# Altium PCB PCB1.PcbDoc
Units mil, origin at the board's own origin, x right, y up, seen from the top; angles counter-clockwise.
Board outline 3950 x 1900 mil, 2 copper layers (Top Layer, Bottom Layer); 32 components, 25 nets, 131 pads, 21 vias.
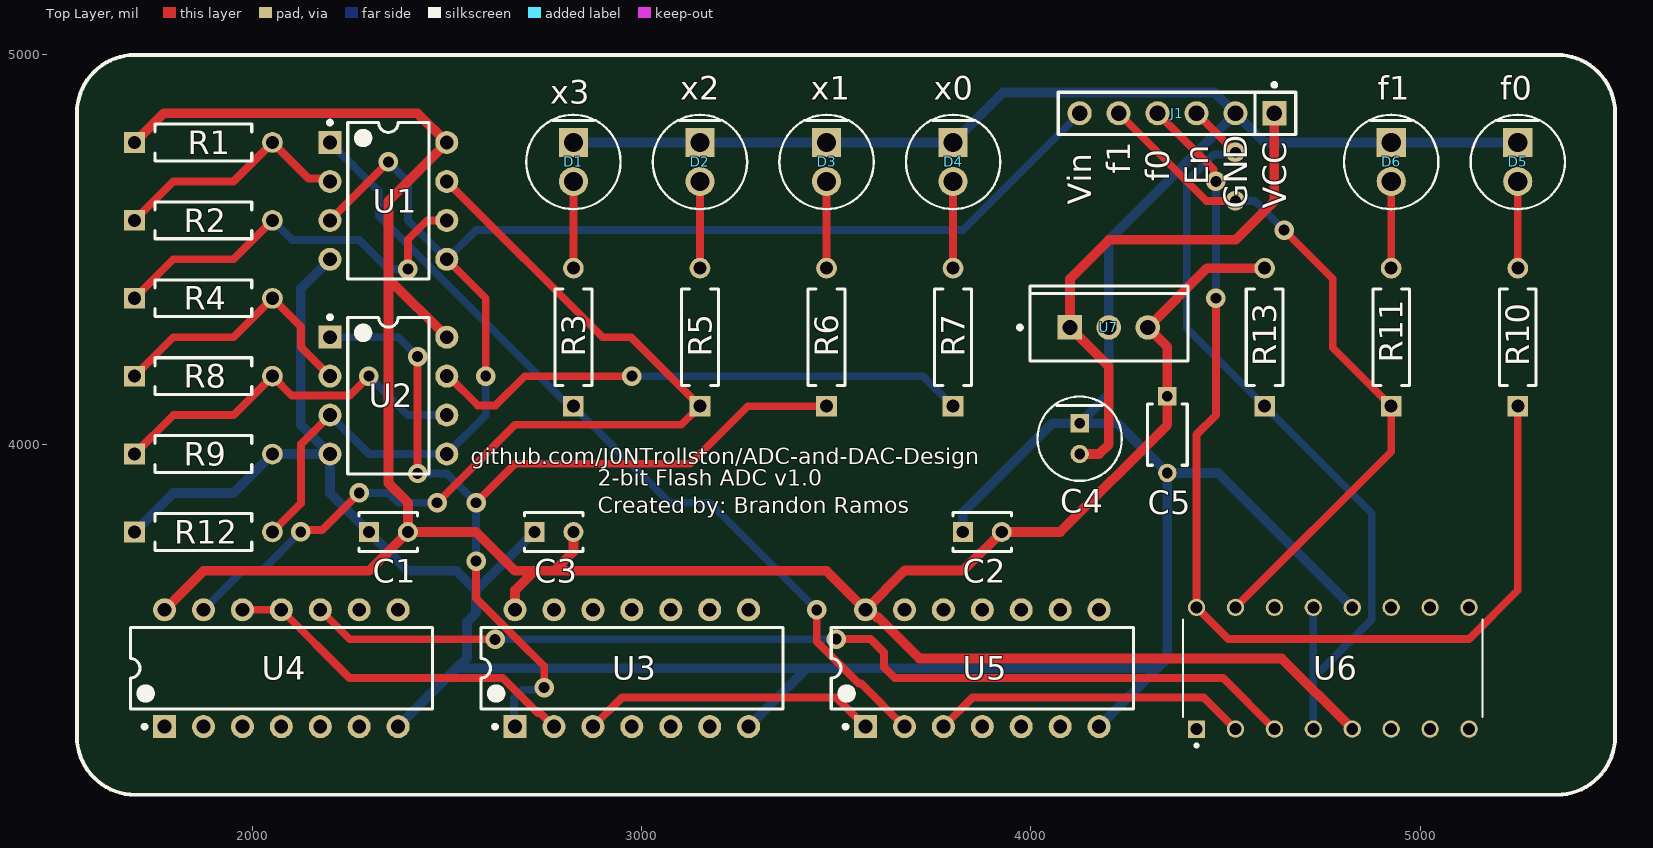
[diagram p0: Top Layer view]
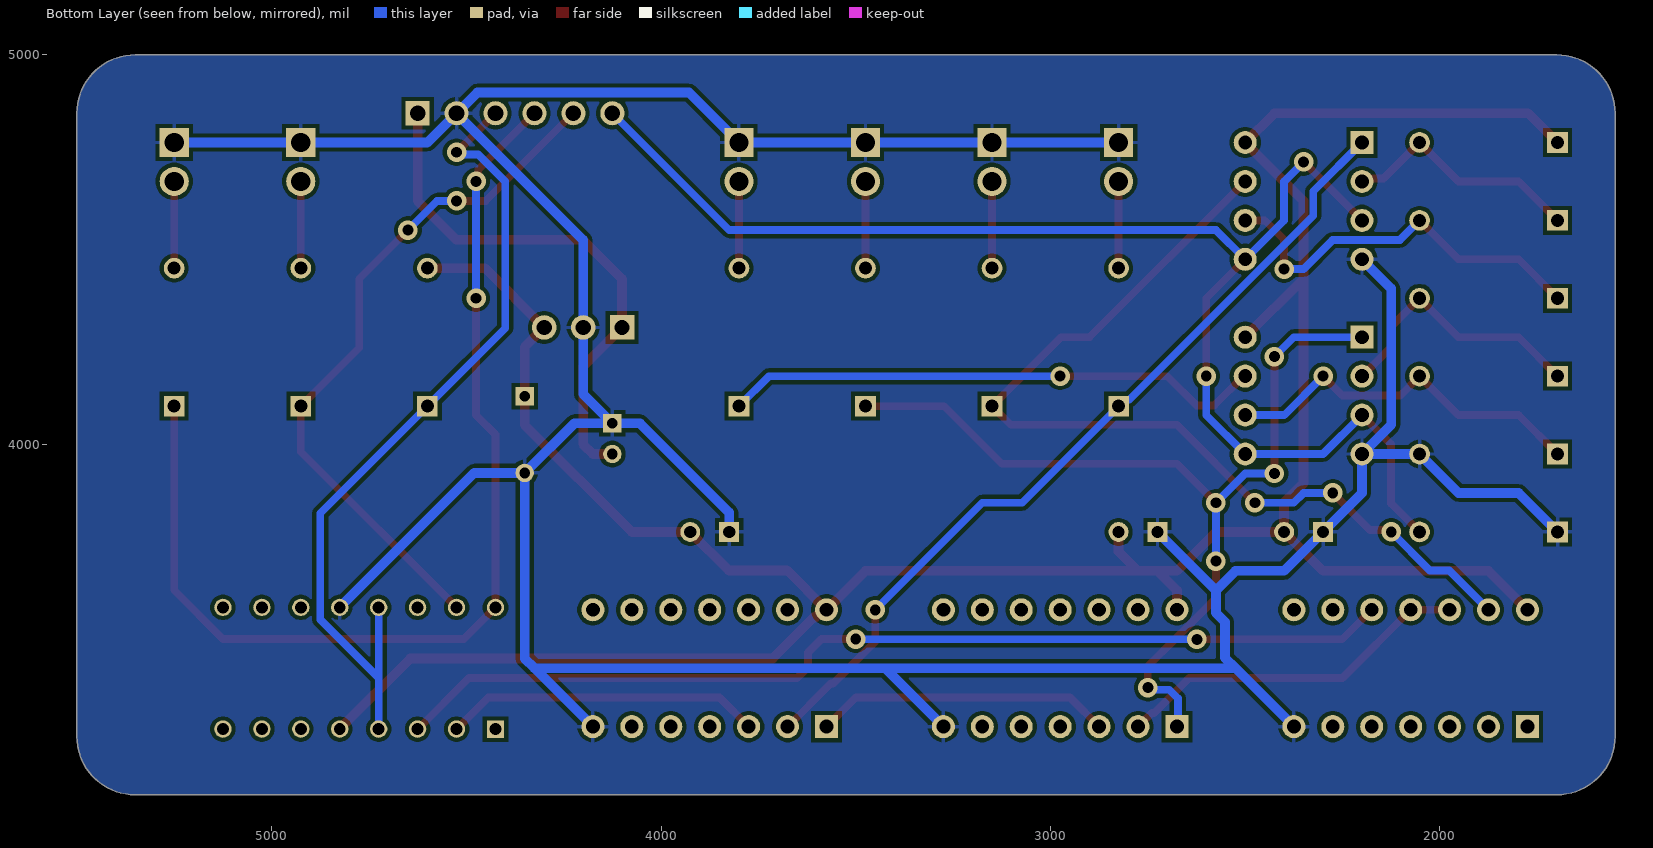
[diagram p1: Bottom Layer view, seen from below]

## Layer stack, top to bottom
Top Solder: solder mask 0.4, Solder Resist, Dk 3.5
Top Layer: signal copper 1.4
Dielectric 1: dielectric 12.6, FR-4, Dk 4.8
Bottom Layer: signal copper 1.4
Bottom Solder: solder mask 0.4, Solder Resist, Dk 3.5

## Board outline
1550,3250 1550,4850 cw(c1700,4850) 1700,5000 5350,5000 cw(c5350,4850) 5500,4850 5500,3250 cw(c5350,3250) 5350,3100 1700,3100 cw(c1700,3250)

## Design rules (kind name [scope] priority, off if disabled: settings)
Clearance POWER [InNetClass('Power')] p1: gap=10 ignorepadtopadclearanceinfootprint=TRUE
Clearance Clearance_1 [All] p2: gap=5 ignorepadtopadclearanceinfootprint=FALSE
PolygonConnect [All] p1: connectstyle=Relief reliefconductorwidth=10 reliefentries=4 polygonreliefangle="90 Angle" airgapwidth=10
RoutingVias [All] p1: holewidth=28 width=50 viastyle="Through Hole" minholewidth=28 minwidth=50 maxholewidth=28 maxwidth=50
SolderMaskExpansion [All] p1: expansion=4 istentingtop=FALSE
Width "Power Width" [InNetClass('Power')] p1: maxlimit=25 minlimit=25 preferedwidth=25
Width Width_1 [All] p2: maxlimit=20 minlimit=20 preferedwidth=20
Width "Schematic Width Constraint" [InNetClass('Power')] p3: maxlimit=10 minlimit=10 preferedwidth=10
30 further rules are at their usual default settings.

## Classes and differential pairs
net class Power: 5V GND VCC
component class U_Priority_Encoder: C2 C3 D5 D6 R10 R11 R13 U3 U4 U5 U6
component class U_Power: C4 C5 J1 U7
component class U_ADC_Logic: C1 D1 D2 D3 D4 R1 R2 R3 R4 R5 R6 R7 R8 R9 R12 U1 U2

## Components (designator, comment, footprint, x,y, rotation, side; value= is the part's Value field where it differs from the comment)
C1 "23nF" KEMT-C315-THT-2 2350,3775 r0 top
C2 "23nF" KEMT-C315-THT-2 3875,3775 r0 top
C3 "23nF" KEMT-C315-THT-2 2775,3775 r0 top
C4 "22uF" FP-RAD-TH-D_5_0_5-L_11_1-MFG 4125,4014.37 r270 top
C5 "0.1uF" FP-K15H5-MFG 4350,4025 r270 top
D1 "LTL2P3KGKNN" FP-LTL2P3KGKNN-MFG 2825,4725 r270 top
D2 "LTL2P3KGKNN" FP-LTL2P3KGKNN-MFG 3150,4725 r270 top
D3 "LTL2P3KGKNN" FP-LTL2P3KGKNN-MFG 3475,4725 r270 top
D4 "LTL2P3KGKNN" FP-LTL2P3KGKNN-MFG 3800,4725 r270 top
D5 "LTL2P3KGKNN" FP-LTL2P3KGKNN-MFG 5250,4725 r270 top
D6 "LTL2P3KGKNN" FP-LTL2P3KGKNN-MFG 4925,4725 r270 top
J1 "22-28-4060" FP-22-28-4060-MFG 4375,4850 r180 top
R1 "MFR-25FBF52-100R" RESA60-630X240 1875,4775 r0 top value=2k
R2 "MFR-25FBF52-100R" RESA60-630X240 1875,4575 r0 top value=1k
R3 "MFR-25FBF52-100R" RESA60-630X240 2825,4275 r90 top value=220
R4 "MFR-25FBF52-100R" RESA60-630X240 1875,4375 r0 top value=1k
R5 "MFR-25FBF52-100R" RESA60-630X240 3150,4275 r90 top value=220
R6 "MFR-25FBF52-100R" RESA60-630X240 3475,4275 r90 top value=220
R7 "MFR-25FBF52-100R" RESA60-630X240 3800,4275 r90 top value=220
R8 "MFR-25FBF52-100R" RESA60-630X240 1875,4175 r0 top value=1k
R9 "MFR-25FBF52-100R" RESA60-630X240 1875,3975 r0 top value=1k
R10 "MFR-25FBF52-100R" RESA60-630X240 5250,4275 r90 top value=220
R11 "MFR-25FBF52-100R" RESA60-630X240 4925,4275 r90 top value=220
R12 "10k" RESA60-630X240 1875,3775 r0 top
R13 "10k" RESA60-630X240 4600,4275 r90 top
U1 "LM358N/NOPB" P0008A 2350,4625 r0 top
U2 "LM358N/NOPB" P0008A 2350,4125 r0 top
U3 "SN74LS08N" N0014A 2975,3425 r90 top
U4 "SN74LS04N" N0014A 2075,3425 r90 top
U5 "SN74LS32N" N0014A 3875,3425 r90 top
U6 "SN74LS75N" DIP794W45P254L1969H508Q16 4775,3425 r90 top
U7 "MC7805CTG" ONSC-TO-220-3-221AB-01 4200,4300 r90 top

## Footprints (in the part's own frame and the unit in brackets; to place one, negate y for a bottom-side part, rotate by r counter-clockwise, add the part's x,y. Pads: shape width x height; smd on the part's side, far side on the other; paste and mask are expansions set on the pad)
DIP794W45P254L1969H508Q16 [mm]
  rect 1.13x1.13 / inner round 1.13 / far side rect 1.13x1.13 hole 0.78: 1(-3.97,8.89)
  round 1.13 hole 0.78: 2(-3.97,6.35) 3(-3.97,3.81) 4(-3.97,1.27) 5(-3.97,-1.27) 6(-3.97,-3.81) 7(-3.97,-6.35) 8(-3.97,-8.89) 9(3.97,-8.89) 10(3.97,-6.35) 11(3.97,-3.81) 12(3.97,-1.27) 13(3.97,1.27) 14(3.97,3.81) 15(3.97,6.35) 16(3.97,8.89)
  silkscreen extent -5.13,-9.77 3.18,9.77, body extent -3.85,-9.65 3.85,9.65, height 5.08
FP-22-28-4060-MFG [mm]
  rect 1.57x1.57 hole 1.02 paste-2539.97 mask+0: 1(-6.35,0)
  round 1.57 hole 1.02 paste-2539.97 mask+0: 2(-3.81,0) 3(-1.27,0) 4(1.27,0) 5(3.81,0) 6(6.35,0)
  silkscreen extent -7.75,-1.97 7.75,1.37, body extent -7.85,-1.47 7.85,1.47, height 0.25
FP-K15H5-MFG [mm]
  rect 1.2x1.2 hole 0.7 paste-2539.97 mask+0: 1(-2.5,0)
  round 1.2 hole 0.7 paste-2539.97 mask+0: 2(2.5,0)
  silkscreen extent -2,-1.3 2,1.3, body extent -3.2,-1.4 3.2,1.4, height 0.25
FP-LTL2P3KGKNN-MFG [mm]
  rect 1.9x1.9 hole 1.25 paste-2539.97 mask+0: 1(-1.27,0)
  round 1.9 hole 1.25 paste-2539.97 mask+0: 2(1.27,0)
  silkscreen extent -3.08,-3.08 3.08,3.08, body extent -3.17,-3.17 3.17,3.17, height 0.25
FP-RAD-TH-D_5_0_5-L_11_1-MFG [mm]
  rect 1.2x1.2 hole 0.7 paste-2539.97 mask+0: 1(-1,0)
  round 1.2 hole 0.7 paste-2539.97 mask+0: 2(1,0)
  silkscreen extent -2.75,-2.75 2.75,2.75, body extent -2.85,-2.85 2.85,2.85, height 0.25
KEMT-C315-THT-2 [mm] "THD, 2-Leads, Body 3.81x2.54mm"
  rect 1.3x1.3 hole 0.8: 1(-1.27,0)
  round 1.3 hole 0.8: 2(1.27,0)
  silkscreen extent -1.91,-1.27 1.91,1.27, body extent -1.91,-1.27 1.91,1.27, height 4.66
N0014A [mm] "DIP, 14-Leads, Body 19.7x6.6mm, Pitch 2.54mm"
  rect 1.5x1.5 hole 0.9: 1(-3.81,7.62)
  round 1.5 hole 0.9: 2(-3.81,5.08) 3(-3.81,2.54) 4(-3.81,0) 5(-3.81,-2.54) 6(-3.81,-5.08) 7(-3.81,-7.62) 8(3.81,-7.62) 9(3.81,-5.08) 10(3.81,-2.54) 11(3.81,0) 12(3.81,2.54) 13(3.81,5.08) 14(3.81,7.62)
  silkscreen extent -3.93,-9.85 2.65,9.85, body extent -3.95,-9.85 3.95,9.85, height 5.08
ONSC-TO-220-3-221AB-01 [mm] "FM, 3-Leads, Body 10.3x4.85mm, Pitch 2.54mm"
  rect 1.6x1.6 hole 1: 1(0,2.54)
  round 1.6 hole 1: 2(0,0) 3(0,-2.54)
  silkscreen extent -2.18,-5.15 2.72,5.92, body extent -2.16,-5.15 2.69,5.15, height 19.68
P0008A [mm] "DIP, 8-Leads, Body 10.15x6.6mm, Pitch 2.54mm"
  rect 1.5x1.5 hole 0.9: 1(-3.81,3.81)
  round 1.5 hole 0.9: 2(-3.81,1.27) 3(-3.81,-1.27) 4(-3.81,-3.81) 5(3.81,-3.81) 6(3.81,-1.27) 7(3.81,1.27) 8(3.81,3.81)
  silkscreen extent -3.93,-5.1 2.65,5.23, body extent -3.95,-5.07 3.95,5.07, height 5.08
RESA60-630X240 [mm] "Axial Resistor, 2-Leads, Dia 2.4mm, Body Length 6.3mm"
  rect 1.35x1.35 hole 0.85: 1(-4.5,0)
  round 1.35 hole 0.85: 2(4.5,0)
  silkscreen extent -3.15,-1.2 3.15,1.2, body extent -4.77,-1.19 4.77,1.2, height 2.4

## Part data
C1 C2 C3: library part CMP-1664-00007-1, "Capacitor, Ceramic, 0.01 uF, +/- 10%, 100 V, X7R, -55 to 125 degC, 2-Pin THD, RoHS, Bulk", Case\Package=PDIP, Forward Current="60 mA", Forward Voltage="1.5 V", Max Operating Temperature="100 degC", Max Power Dissipation="400 mW", Min Operating Temperature="-55 degC", Output Voltage="70 V", Package Quantity=2000, Channels=2, ComponentLink1Description="Manufacturer URL", ComponentLink1URL=http://www.kemet.com/, ComponentLink2Description=Datasheet, ComponentLink2URL=http://capacitoredge.kemet.com/capedge2/DataSheet/Datasheet-C315C103K1R5TA.pdf?pn=C315C103K1R5TA{BULK}, DatasheetVersion=Aug-16, Mount="Through Hole", Nominal Vf="1.3 V", PackageDescription="2-Pin Through Hole Device, Body 3.81 x 2.54 mm", PackageReference=C315-THT-2, Packaging=Rail/Tube, Pins=16, Radiation Hardening=No, REACH SVHC=Unknown, RoHSCompliant=true, Vce Max="500 mV"
C4: library part CMP-05427-001989-1, "Aluminum Electrolytic Capacitors (Radial Lead Type) AEC-Q200 Qualified 22uF ±20% 50V", Case/Package=Radial, ESR (Equivalent Series Resistance)=1.3R, Leakage Current=3uA, Max Operating Temperature=105°C, Min Operating Temperature=-55°C, Package Quantity=2000, Ripple Current=155mA, Tolerance=20%, Voltage Rating=50V, Capacitance=22uF, Contact Plating=Tin, Diameter=5mm, Features="General Purpose", Height=11mm, Height - Seated (Max)=0.472inch, Impedance=1.3R, Lead Diameter=0.5mm, Lead Pitch=0.197inch, Length=11mm, Life (Hours)=1000Hour, Mount="Through Hole", Packaging="Tape and Reel", Polarity=Polar, Radiation Hardening=No, RoHS Compliant=Yes, Series=FC, Termination=Radial, Voltage Rating (DC)=50V
C5: library part CMP-02417-000078-1, "CAP CER 0.1UF 50V X7R RADIAL", Capacitance=100nF, Case/Package=Dipped, Dielectric=X7R, Dielectric Material=Ceramic, Max Operating Temperature=125°C, Min Operating Temperature=-55°C, Package Quantity=1, Tolerance=10%, Voltage=50V, Construction=RADIAL, Depth=2.5mm, Diameter=500um, Height=4mm, Height - Seated (Max)=0.257inch, Lead Diameter=0.5mm, Lead Free="Lead Free", Lead Length=30mm, Lead Pitch=5mm, Lead/Base Style="Formed Leads", Length=4mm, Mount="Through Hole", Packaging="Tape and Reel", Radiation Hardening=No, RoHS Compliant=Yes, Series=K, Termination=Radial, Thickness=2.6mm, Voltage Rating=50V, Voltage Rating (DC)=50V, Weight=0.005644oz, Width=2.5mm
D1 D2 D3 D4 D5 D6: library part CMP-22017-000002-1, "LED GREEN CLEAR T-1 3/4 T/H", Colour=Green, Forward Current=20mA, Forward Voltage=2.1V, Manufacturer=Lite-On, Package=0, Power Dissipation=75mW, Reverse Voltage=5V, Temperature="-40°C to +100°C", Temperature Range High=+100°C, Temperature Range Low=-40°C, Automotive=No, Category=Diode, ComponentLink2Description=Datasheet, ComponentLink2URL=https://optoelectronics.liteon.com/upload/download/DS20-2000-193/LTL2P3KGKNN.pdf, Device Class L1=Optoelectronics, Device Class L2=LEDs, Device Class L3=unset, Digikey Description="LED GREEN CLEAR T-1 3/4 T/H", Height=9.95mm, Lead Free=Yes, Led Orientation=Straight, Luminous Intensity=980mcd, Manufacturer Part Number=LTL2P3KGKNN, Mouser Description="LED Uni-Color Green 575nm 2-Pin T-1 3/4", Octopart=https://octopart.com/ltl2p3kgknn-lite-on-550036, Peak Emmision Wavelength=575nm, RoHS=TRUE, Viewing Angle=22°, Wavelength=572nm
J1: library part CMP-04776-000763-1, "CONN HEADER VERT 6POS 2.54MM", Color=Black, Contact Resistance=20mR, Current Rating=4A, Max Operating Temperature=75°C, Max Voltage Rating (AC)=250V, Max Voltage Rating (DC)=250.25kV, Min Operating Temperature=0°C, Package Quantity=1, Connector Type="Male Pin", Contact Material=Brass, Contact Mating Length=0.24inch, Contact Plating=Tin, Contact Type="Male Pin", Depth=2.49mm, Gender=Male, Housing Color=Black, Housing Material=Thermoplastic, Length=15.24mm, Mount="Through Hole", Number of Contacts=6, Number of Positions=6, Number of Rows=1, Orientation=Straight, Packaging=Bulk, Pitch=2.54mm, RoHS Compliant=Yes, Series="KK® 42375", Termination=Solder, Voltage Rating=250V
R1 R2 R3 R4 R5 R6 R7 R8 R9 R10 R11 R12 R13: library part CMP-009-00046-4, "Axial Resistor, 100 Ohm, +/- 1%, 0.25 W, -55 to 155 degC, 2-Pin THD, RoHS, Bulk", Case/Package=Axial, Manufacturer=Yageo, Max Operating Temperature=155°C, Min Operating Temperature=-55°C, Package Description="2-Pin Axial Lead, Dia 2.4 mm, Body Length 6.3 mm", Package Quantity=200, Package Reference=MFR-25, Power=250mW, Tolerance=1%, Voltage Rating=250V, Composition=CarbonFilm, Datasheet URL=http://www.yageo.com/documents/recent/Yageo%20LR_MFR_2013.pdf, Datasheet Version=Apr-13, Manufacturer URL=http://www.yageo.com/, Mounting Technology=TH, Packaging=Bulk, RoHS Compliant=True
U1 U2: library part CMP-0055-00153-3, "Low Power Dual Operational Amplifier, 8-pin MDIP, Pb-Free", Manufacturer="Texas Instruments", Package Reference=P0008A, PackageTopMarking=NSUZXYTTE#*LM*358N, PowerWise=N, Code_JEDEC=MS-001-BA, ComponentLink1Description="Datasheet URL", ComponentLink1URL=http://www.ti.com/general/docs/lit/getliterature.tsp?genericPartNumber=LM358-N&fileType=pdf, CompType=Amplifiers, PackageDescription="MDIP, .365 x .250 x .130in, 8 Lead, .100in Pitch", PinCount=8, RoHS=Y
U3: library part CMP-0777-00259-3, "Quadruple 2-Input Positive-AND Gates, N0014A, TUBE", F @ Nom Voltage(Max)(Mhz)=35, Generic Part Number=SN74LS08, ICC @ Nom Voltage(Max)(mA)=0.021, Manufacturer="Texas Instruments", Operating Temperature Range(C)="0 to 70", Rating=Catalog, tpd @ Nom Voltage(Max)(ns)=25, Voltage(Nom)(V)=5, Bits(#)=4, DatasheetVersion=SDLS033, Input Type=TTL, Output Drive (IOL/IOH)(Max)(mA)=-0.8/16, Output Type=TTL, PackageReference=N0014A, Schmitt Trigger=No, Technology Family=LS, VCC(Max)(V)=5.25, VCC(Min)(V)=4.75
U4: library part CMP-1615-00911-2, "Hex inverters, N0014A, TUBE", F @ Nom Voltage(Max)(Mhz)=35, Generic Part Number=SN74LS04, ICC @ Nom Voltage(Max)(mA)=0.033, Manufacturer="Texas Instruments", Operating Temperature Range(C)="0 to 70", Rating=Catalog, tpd @ Nom Voltage(Max)(ns)=22, Voltage(Nom)(V)=5, Bits(#)=6, Code_JEDEC=MS-001, DatasheetVersion=SDLS029C, Input Type=TTL, Output Drive (IOL/IOH)(Max)(mA)=-0.4/8, Output Type=CMOS, PackageReference=N0014A, Schmitt Trigger=No, Technology Family=LS, VCC(Max)(V)=5.25, VCC(Min)(V)=4.75
U5: library part CMP-1573-00145-3, "Quad 2-input positive-OR gates, N0014A, TUBE", F @ Nom Voltage(Max)(Mhz)=35, Generic Part Number=SN74LS32, ICC @ Nom Voltage(Max)(mA)=0.038, Manufacturer="Texas Instruments", Operating Temperature Range(C)="0 to 70", Rating=Catalog, tpd @ Nom Voltage(Max)(ns)=22, Voltage(Nom)(V)=5, Bits(#)=4, Code_JEDEC=MS-001, DatasheetVersion=SDLS100, Input Type=TTL, Output Drive (IOL/IOH)(Max)(mA)=0.8/-16, Output Type=TTL, PackageReference=N0014A, PackageVersion=http://www.ti.com/lit/ml/mpdi002c/mpdi002c.pdf, VCC(Max)(V)=5.25, VCC(Min)(V)=4.75
U6: "Quad bistable latches", Package="PDIP-16 Texas Instruments", Availability="In Stock", Check_prices=https://www.snapeda.com/parts/SN74LS75N/Texas+Instruments/view-part/?ref=eda, MF="Texas Instruments", MP=SN74LS75N, Price=None, Purchase-URL=https://pricing.snapeda.com/search/part/SN74LS75N/?ref=eda, SnapEDA_Link=https://www.snapeda.com/parts/SN74LS75N/Texas+Instruments/view-part/?ref=snap
U7: library part CMP-2000-04928-1, "Positive Voltage Regulator, 1 A, 5 V, 0 to 125 degC, 3-Pin TO-220, RoHS, Tube", Current, Output, Maximum=1A, Current, Quiescent Supply=6.5mA, Current, Supply=3.2mA, Dropout Voltage=2V, Manufacturer="ON Semiconductor", Package Description="3-Pin Flange Mount, Vertical Straight Lead, Body 9.97 x 4.445 mm, Pitch 2.54 mm", Package Reference=TO-220-3-221AB-01, Package Type=TO-220, Package Version="Rev. A, 11/2010", Resistance, Thermal, Junction to Case=5degC/W, Temperature, Operating, Maximum=+125degC, Temperature, Operating, Minimum=0degC, Temperature, Operating, Range=0to+125degC, Voltage, Input Range=Maximumof35V, Voltage, Input, High Level=35V, Voltage, Noise=10μV/V, Voltage, Output=5V, Datasheet URL=http://www.onsemi.com/pub_link/Collateral/MC7800-D.PDF, Datasheet Version="Rev. 27, 11/2014", Dimensions=10.28x4.82x15.75mm, Dropout Voltage Measurement Current=1A, Height=15.75mm, Length=10.28mm, Line Regulation=20mV, Load Regulation=25mV, Manufacturer URL=http://www.onsemi.com/, Mounting Type=ThroughHole, Number of Outputs=1, Number of Pins=3, Output Type=Fixed, Polarity=Positive, Regulation, Line=0.5mV, Regulation, Load=1.3mV, Regulator Function=Standard, Regulator Type=PositiveVoltageOut, Type=VoltageRegulator, Voltage, Dropout=2V, Voltage, Supply=35V, Width=4.82mm

## Via types
v1: diameter 50, hole 28, Top Layer to Bottom Layer, 21 vias

## Nets (pads, with @x,y where several pads share a name; then routed paths per layer and width w, separated by ;. In a path a pad name is that pad's centre, name@x,y a point inside that pad or via, vN(x,y) a via of type N, cw(c..) or ccw(c..) an arc to the next point about the centre after c; other vN are vias at no path point)
5V: C1.2 C2.2 C3.2 C5.1 R1.1 R13.2 U1.8 U2.8 U3.14 U4.14 U5.14 U6.5 U7.3 | length 7348.7
  Top Layer w25: R1.1 1772.83,4850 2425,4850 U1.8 2350,4625 2350,4425 ; U4.14 1875,3675 2300,3675 C1.2 ; U2.8 2350,4425 ; U3.14 2675,3625 2725,3675 ; C3.2 2825,3725 2775,3675 ; R13.2 4452.17,4452.17 U7.3 4350,4250 C5.1 4350,4050 4075,3775 C2.2 3825.75,3675.75 3675.75,3675.75 U5.14 ; U6.5 4643.7,3450 3713.3,3450 3608.18,3555.11 3604.1,3555.11 3584.22,3575 U5.14 ; 2350,4425 2350,3900 2400,3850 C1.2 ; C1.2 2575,3775 2675,3675 2725,3675 ; 2725,3675 2775,3675 ; 2775,3675 3475,3675 U5.14
f0: J1.4 R10.1 U6.16 | length 2734.8
  Top Layer w20: J1.4 4469.26,4705.74 4469.26,4680.74 v1(4475,4675) ; v1(4475,4375) 4475,4075 4425,4025 U6.16 4506.3,3500 5125,3500 5250,3625 R10.1
  Bottom Layer w20: v1(4475,4375) v1(4475,4675)
f1: J1.5 R11.1 U6.15 | length 1797.6
  Top Layer w20: J1.5 4450,4625 v1(4525,4625) ; U6.15 4925,3981.3 R11.1 4775,4247.83 4775,4425 v1(4650,4550)
  Bottom Layer w20: v1(4525,4625) 4575,4625 v1(4650,4550)
GND: C1.1 C2.1 C3.1 C4.1 C5.2 D1.1 D2.1 D3.1 D4.1 D5.1 D6.1 J1.2 R9.2 R12.1 U1.4 U2.4 U3.7 U4.7 U5.7 U6.12 U7.2 | length 9940.6
  Bottom Layer w25: R12.1 1797.83,3875 1952.17,3875 R9.2 U2.4 ; U1.4 2125,4400 2125,4050 U2.4 ; U4.7 2525,3425 ; C3.1 2575,3625 ; D1.1 D2.1 D3.1 D4.1 3928.41,4903.41 4471.59,4903.41 J1.2 ; U3.7 3425,3425 ; C2.1 3825,3825 4053.74,4053.74 C4.1 ; U5.7 4325,3425 ; U6.12 4479.72,3926.57 C5.2 ; D5.1 D6.1 4600,4775 J1.2 ; U2.4 2200,3875 C1.1 2400,3675 2525,3675 2575,3625 ; 2525,3425 2551.69,3451.69 2551.69,3543.87 2575,3567.18 2575,3625 ; 2525,3425 3425,3425 ; 3425,3425 4325,3425 ; C4.1 4222.83,4053.74 C5.2 ; C4.1 4200,4128.74 U7.2 4200,4525 J1.2 ; 4325,3425 4350,3450 C5.2
NetD1_2: D1.2 R3.2 | length 222.8
  Top Layer w20: R3.2 D1.2
NetD2_2: D2.2 R5.2 | length 222.8
  Top Layer w20: R5.2 D2.2
NetD3_2: D3.2 R6.2 | length 222.8
  Top Layer w20: R6.2 D3.2
NetD4_2: D4.2 R7.2 | length 222.8
  Top Layer w20: R7.2 D4.2
NetD5_2: D5.2 R10.2 | length 222.8
  Top Layer w20: R10.2 D5.2
NetD6_2: D6.2 R11.2 | length 222.8
  Top Layer w20: R11.2 D6.2
NetJ1_3: J1.3 R13.1 U6.4 U6.13 | length 2144
  Top Layer w20: J1.3 v1(4525,4750)
  Bottom Layer w20: v1(4525,4750) 4519.26,4744.26 4469.26,4744.26 4400,4675 4400,4297.83 R13.1 4875,3822.83 4875,3550 4725,3400 ; U6.4 4725,3400 ; U6.13 4725,3400
NetJ1_6: J1.6 R12.2 U1.3 U1.5 U2.3 U2.5 | length 3590.1
  Top Layer w20: R12.2 2125.52,3848.35 2125.52,4000.52 U2.3 ; U1.3 v1(2350,4725) ; U1.5 2600,4375 v1(2600,4175)
  Bottom Layer w20: U2.3 2300,3975 U2.5 2600,4075 v1(2600,4175) ; v1(2350,4725) 2400,4675 2400,4575 U1.5 2575,4550 3825,4550 J1.6
NetR1_2: R1.2 R2.1 U1.2 | length 626.4
  Top Layer w20: R2.1 1797.83,4675 1952.17,4675 R1.2 2144.69,4682.47 2192.53,4682.47 U1.2
NetR2_2: R2.2 R4.1 U1.6 | length 1032.5
  Top Layer w20: R4.1 1797.83,4475 1952.17,4475 R2.2 ; v1(2400,4450) 2400,4525 2450,4575 U1.6
  Bottom Layer w20: R2.2 2102.64,4524.53 2275.47,4524.53 2350,4450 v1(2400,4450)
NetR4_2: R4.2 R8.1 U2.2 | length 698.4
  Top Layer w20: R8.1 1797.83,4275 1952.17,4275 R4.2 2125.52,4301.65 2125.52,4249.48 U2.2
NetR8_2: R8.2 R9.1 U2.6 | length 967.9
  Top Layer w20: R9.1 1797.83,4075 1952.17,4075 R8.2 2102.17,4125 2250,4125 v1(2300,4175)
  Bottom Layer w20: v1(2300,4175) 2400,4075 U2.6
NetU3_2: U3.2 U4.11 U4.12 | length 924.3
  Top Layer w20: U4.12 U4.11 2250,3400 2643.43,3400 2733.43,3310 2740,3310 U3.2
NetU3_3: U3.3 U5.1 | length 762.1
  Top Layer w20: U3.3 2950,3350 3500,3350 U5.1
VCC: C4.2 J1.1 U7.1 | length 1384.6
  Top Layer w25: C4.2 4175,3975 4200,4000 4200,4200 U7.1 4100,4425 4200,4525 4525,4525 4625,4625 J1.1
x0: R7.1 U2.7 | length 1392.4
  Top Layer w20: U2.7 2504.18,4175 2579.18,4100 2625,4100 2700,4175 v1@2973.28,4175
  Bottom Layer w20: v1(2975,4175) 3722.83,4175 R7.1
x1: R6.1 U2.1 U3.1 | length 2439.1
  Top Layer w20: v1(2425,3925) v1(2425,4225) ; v1(2575,3700) 2575,3604.96 2679.96,3500 2749.96,3430 v1(2750,3375) v1(2750,3375) ; v1(2575,3850) 2675,3950 3125,3950 3272.83,4097.83 R6.1
  Bottom Layer w20: U2.1 2375,4275 v1(2425,4225) ; v1(2425,3925) 2500,3925 v1(2575,3850) v1(2575,3700) ; U3.1 2672.81,3277.19 2672.81,3347.81 2695,3370 2745,3370 v1(2750,3375)
x2: R5.1 U1.7 U4.13 | length 2401.3
  Top Layer w20: v1(2125,3775) 2130,3780 2180,3780 v1(2275,3875) ; v1(2475,3850) 2675,4050 3102.17,4050 R5.1 2972.83,4275 2900,4275 U1.7
  Bottom Layer w20: U4.13 1975.87,3675.87 2025.87,3675.87 v1(2125,3775) ; v1(2275,3875) 2350,3875 2375,3850 v1(2475,3850)
x3: R3.1 U1.1 U5.2 | length 2181
  Top Layer w20: v1(3450,3575) 3450,3493.43 3557.84,3385.59 3564.41,3385.59 U5.2
  Bottom Layer w20: U1.1 2325,4650 2325,4587.03 2797.62,4114.41 2808.43,4114.41 R3.1 3072.83,3850 3175,3850 v1(3450,3575)
y0: U5.3 U6.2 | length 814.7
  Top Layer w20: U5.3 3850,3350 4443.7,3350 U6.2
y1: U4.10 U6.3 | length 2599.8
  Top Layer w20: U4.10 2250.81,3499.19 v1(2624.19,3499.19) ; v1(3500,3500) 3588.01,3500 3622.53,3465.47 3622.53,3427.47 3650,3400 4493.7,3400 U6.3
  Bottom Layer w20: v1(2624.19,3499.19) 2624.6,3499.6 3499.6,3499.6 v1(3500,3500)
pads on no net: U3.4 U3.5 U3.6 U3.8 U3.9 U3.10 U3.11 U3.12 U3.13 U4.1 U4.2 U4.3 U4.4 U4.5 U4.6 U4.8 U4.9 U5.4 U5.5 U5.6 U5.8 U5.9 U5.10 U5.11 U5.12 U5.13 U6.1 U6.6 U6.7 U6.8 U6.9 U6.10 U6.11 U6.14

## Polygon pours and split planes (outlines as drawn)
GND on Bottom Layer "GND_L02_P000" (solid, remove dead copper, pour order 0): 1550,3250 1550,4850 cw(c1700,4850) 1700,5000 5350,5000 cw(c5350,4850) 5500,4850 5500,3250 cw(c5350,3250) 5350,3100 1700,3100 cw(c1700,3250)

## Silkscreen, mask and mechanical layers (free items; w line width, h text height)
Top Overlay:
  the board outline again, w10
  text "x2" at 3100.02,4885 h60
  text "x1" at 3435.01,4885 h60
  text "x0" at 3750.02,4885 h60
  text "f1" at 4890.01,4885 h60
  text "f0" at 5205.01,4885 h60
  text "x3" at 2765.02,4875 h60
  text "f1" at 4254.99,4695.02 h60 r90
  text "f0" at 4354.99,4675.03 h60 r90
  text "En" at 4454.99,4665.03 h60 r90
  text "Vin" at 4154.99,4615.05 h60 r90
  text "GND" at 4554.99,4605.05 h60 r90
  text "VCC" at 4654.99,4605.05 h60 r90
  text "github.com/J0NTrollston/ADC-and-DAC-Design" at 2561.9,3934.36 h70
  text "2-bit Flash ADC v1.0 / Created by: Brandon Ramos" at 2887.64,3808.98 h70